# Altium PCB CH340S36P-R1.PcbDoc
Units mil, origin at the board's own origin, x right, y up, seen from the top; angles counter-clockwise.
Board outline 1580 x 815 mil, 2 copper layers (TopLayer, BottomLayer); 10 components, 26 nets, 84 pads, 20 vias.
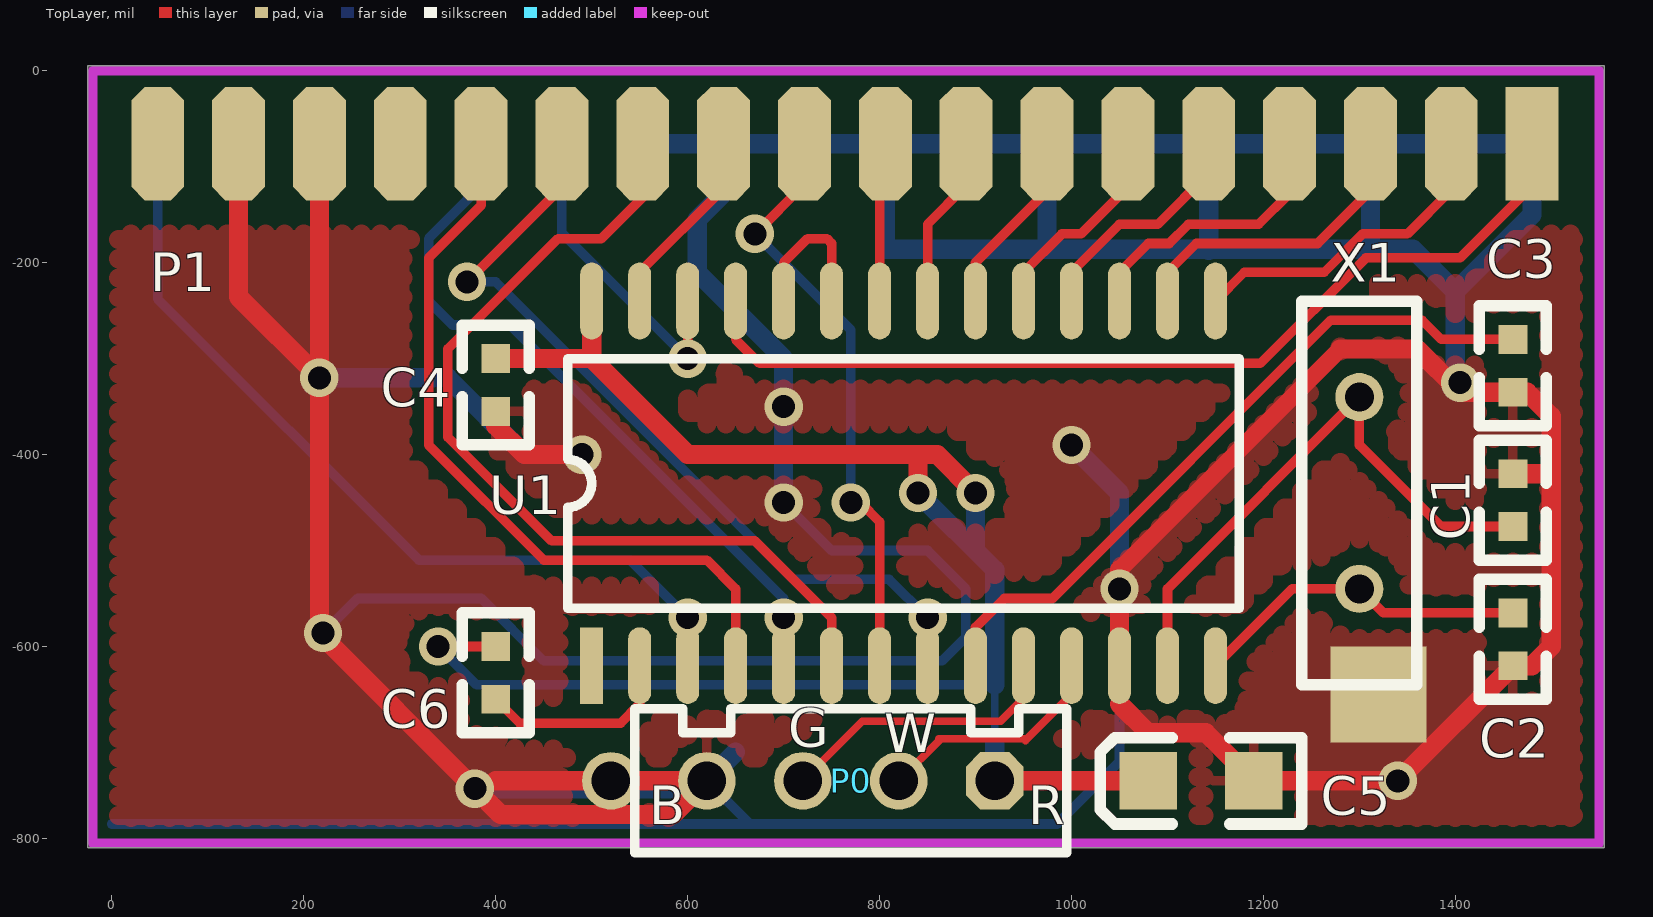
[diagram p0: TopLayer view]
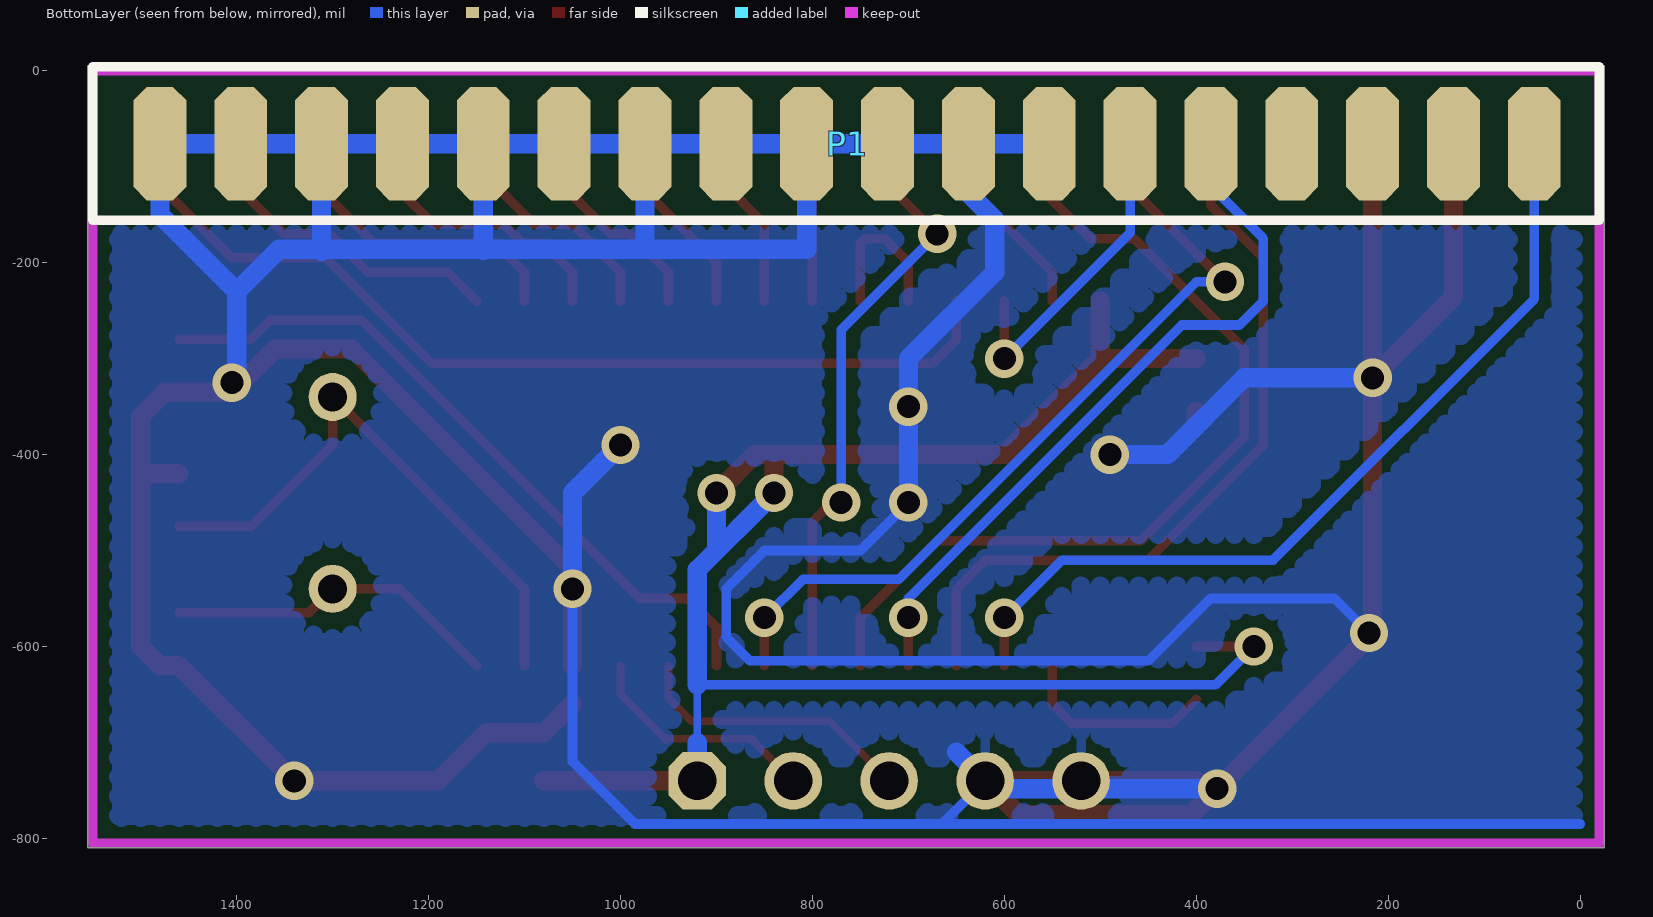
[diagram p1: BottomLayer view, seen from below]

## Layer stack, top to bottom
TopSolder: solder mask 0.4, Solder Resist, Dk 3.5
TopLayer: signal copper 1.4
Dielectric1: dielectric 12.6, FR-4, Dk 4.8
BottomLayer: signal copper 1.4
BottomSolder: solder mask 0.4, Solder Resist, Dk 3.5

## Board outline
-25,-810 1555,-810 1555,5 -25,5

## Design rules (kind name [scope] priority, off if disabled: settings)
Clearance Clearance_1 [(InPoly)] p1: gap=12 ignorepadtopadclearanceinfootprint=FALSE
Clearance [All] p2: gap=10 ignorepadtopadclearanceinfootprint=FALSE
ComponentClearance [All] p1 off: gap=10 collisioncheckmode=3 verticalgap=10 showdistances=FALSE
FabricationTestPointUsage TestPointUsage [All] p1: valid=0 allowmultiple=FALSE
FabricationTestpoint Testpoint [All] p1: side=3 testpointundercomponent=TRUE minsize=40 maxsize=100 preferedsize=60 minholesize=20 maxholesize=40 preferedholesize=32 testpointgrid=1 allowsidetop=TRUE allowsidebottom=TRUE usegrid=TRUE gridtolerance=0.01
PolygonConnect [All] p1: connectstyle=Relief reliefconductorwidth=10 reliefentries=4 polygonreliefangle="90 Angle" airgapwidth=10
RoutingPriority [All] p1: routingpriority=4
RoutingVias [All] p1: holewidth=24 width=40 viastyle="Through Hole" minholewidth=24 minwidth=40 maxholewidth=28 maxwidth=40
SolderMaskExpansion [All] p1: expansion=4 istentingtop=FALSE
Width Width_3 [InNet('VCC')] p1: maxlimit=30 minlimit=8 preferedwidth=20
Width Width_1 [InNet('GND')] p2: maxlimit=30 minlimit=8 preferedwidth=20
Width [All] p3: maxlimit=30 minlimit=8 preferedwidth=10
26 further rules are at their usual default settings.

## Components (designator, comment, footprint, x,y, rotation, side; value= is the part's Value field where it differs from the comment)
C1 "33p" 0603 1460,-420 r270 top
C2 "33p" 0603 1460,-620 r90 top
C3 "0.1uF" 0603 1460,-280 r270 top
C4 "0.1uF" 0603 400,-300 r270 top
C5 "10uF" 3216 1080,-740 r180 top
C6 "0.1uF" 0603 400,-600 r270 top
P0 "USB" SIP04 920,-740 r270 top
P1 "1284B" 1284B-DB36 1480,-76 r180 bottom
U1 "CH340S" SOP28 500,-620 r90 top
X1 "12MHz" XTAL1 1300,-340 r0 top

## Footprints (in the part's own frame and the unit in brackets; to place one, negate y for a bottom-side part, rotate by r counter-clockwise, add the part's x,y. Pads: shape width x height; smd on the part's side, far side on the other; paste and mask are expansions set on the pad)
0603 [mil]
  rect 30x30 smd: 1(0,0) 2(55,0)
  silkscreen extent -35,-35 90,35
1284B-DB36 [mm]
  rect 1.4x3 smd far side: 1(0,0)
  oct 1.4x3 smd far side: 2(2.14,0) 3(4.28,0) 4(6.42,0) 5(8.56,0) 6(10.7,0) 7(12.84,0) 8(14.98,0) 9(17.12,0) 10(19.26,0) 11(21.4,0) 12(23.54,0) 13(25.68,0) 14(27.82,0) 15(29.96,0) 16(32.1,0) 17(34.24,0) 18(36.38,0)
  oct 1.4x3 smd: 19(0,0) 20(2.14,0) 21(4.28,0) 22(6.42,0) 23(8.56,0) 24(10.7,0) 25(12.84,0) 26(14.98,0) 27(17.12,0) 28(19.26,0) 29(21.4,0) 30(23.54,0) 31(25.68,0) 32(27.82,0) 33(29.96,0) 34(32.1,0) 35(34.24,0) 36(36.38,0)
  silkscreen extent -1.78,-2.03 38.1,2.03
3216 [mil]
  rect 60x60 smd: 1(0,0) 2(-110,0)
  silkscreen extent -160,-45 50,45
SIP04 [mil]
  oct 60x60 hole 40: 1(0,0)
  round 60 hole 40: 2(0,-100) 3(0,-200) 4(0,-300)
  silkscreen extent -75,-375 75,75
SOP28 [mil]
  rect 80x24 smd: 1(0,0)
  oval 80x24 smd: 2(0,-50) 3(0,-100) 4(0,-150) 5(0,-200) 6(0,-250) 7(0,-300) 8(0,-350) 9(0,-400) 10(0,-450) 11(0,-500) 12(0,-550) 13(0,-600) 14(0,-650) 15(380,-650) 16(380,-600) 17(380,-550) 18(380,-500) 19(380,-450) 20(380,-400) 21(380,-350) 22(380,-300) 23(380,-250) 24(380,-200) 25(380,-150) 26(380,-100) 27(380,-50) 28(380,0)
  silkscreen extent 60,-675 320,25
XTAL1 [mil]
  round 50 hole 30: 1(0,0) 2(0,-200)
  silkscreen extent -60,-300 60,100

## Part data
C1 C2 C3 C6: library part CAP
C4 C5: library part CAP, "Capacitor"
U1: library part CH340S_P
X1: library part CRYSTAL, "Crystal"

## Free pads (board coordinates)
  round 60 hole 40: 0(520,-740)
  rect 100x100 smd: 1(1320,-650)

## Via types
v1: diameter 40, hole 24, TopLayer to BottomLayer, 20 vias

## Nets (pads, with @x,y where several pads share a name; then routed paths per layer and width w, separated by ;. In a path a pad name is that pad's centre, name@x,y a point inside that pad or via, vN(x,y) a via of type N, cw(c..) or ccw(c..) an arc to the next point about the centre after c; other vN are vias at no path point)
ACK#: P1.10 U1.7 | length 625.1
  TopLayer w10: v1(670,-170) 721.73,-118.27 P1.10 ; v1(770,-450) 780,-450 800,-470 U1.7
  BottomLayer w10: v1(670,-170) 770,-270 v1(770,-450)
AFD#: P1.14 U1.4 | length 798.8
  TopLayer w10: P1.14 384.72,-140.28 330,-195 330,-390 450,-510 620,-510 650,-540 U1.4
BUSY: P1.11 U1.27 | length 200.2
  TopLayer w10: U1.27 550,-210 637.48,-122.52 P1.11
D0: P1.2 U1.15 | length 341.9
  TopLayer w10: U1.15 1180,-210 1263.43,-210 1303.43,-170 1350,-170 1395.75,-124.25 P1.2
D1: P1.3 U1.16 | length 325.7
  TopLayer w10: U1.16 1100,-210 1130,-180 1256.5,-180 1311.5,-125 P1.3
D2: P1.4 U1.17 | length 293.1
  TopLayer w10: U1.17 1050,-210 1080,-180 1101.72,-180 1121.72,-160 1195,-160 1227.24,-127.76 P1.4
D3: P1.5 U1.18 | length 246.7
  TopLayer w10: U1.18 1000,-210 1050,-160 1090,-160 1142.99,-107.01 P1.5
D4: P1.6 U1.19 | length 220.8
  TopLayer w10: U1.19 950,-210 990,-170 1010,-170 1058.74,-121.26 P1.6
D5: P1.7 U1.20 | length 194.9
  TopLayer w10: U1.20 900,-200 974.49,-125.51 P1.7
D6: P1.8 U1.21 | length 180.7
  TopLayer w10: U1.21 850,-160 890.24,-119.76 P1.8
D7: P1.9 U1.22 | length 166.5
  TopLayer w10: U1.22 800,-81.98 P1.9
ERR#: P1.32 U1.5 | length 755.1
  TopLayer w10: U1.5 v1(700,-570)
  BottomLayer w10: P1.32 384.72,-120.28 330,-175 330,-240 355,-265 415,-265 700,-550 v1(700,-570)
GND: C1.1 C2.1 C3.2 C4.2 C5.2 P0.4 P1.16 P1.17 P1.19 P1.20 P1.21 P1.22 P1.23 P1.24 P1.25 P1.26 P1.27 P1.28 P1.29 P1.30 pad.0 pad.1 U1.12 | length 8901.6
  TopLayer w18: 1050,-520 1280,-290
  TopLayer w20: P1.17 131.97,-235.75 v1(216.22,-320) ; P1.16 216.22,-586.22 v1(378.19,-748.19) 405,-775 585,-775 P0.4 400,-740 ; C4.2 400,-370 430,-400 v1(490,-400) ; 1050,-660 1080,-690 1140,-690 C5.2 v1(1340,-740) C2.1 1480,-620 1500,-600 1500,-360 1475,-335 v1@1405,-335 ; U1.12 1050,-520 ; 1280,-290 1360,-290 v1@1405,-335 ; v1(1405,-325) v1@1405,-335 ; C1.1 1500,-420
  BottomLayer w10: 0,-785 985,-785 1050,-720 v1(1050,-540) ; v1(220,-586) 256,-550 385,-550 450,-615 865,-615 890,-590 890,-540 850,-500 750,-500 v1(700,-450) ; P0.4 665,-785
  BottomLayer w20: v1(216.22,-320) 350,-320 430,-400 v1(490,-400) ; v1(378.19,-748.19) 611.81,-748.19 650,-710 ; P1.30 P1.19 1480,-150 1400,-230 ; P1.29 637.48,-127.52 610,-155 610,-210 700,-300 v1(700,-450) ; P1.27 805.98,-185.98 1355.98,-185.98 1400,-230 ; 974.49,-184.49 P1.25 ; v1(1000,-390) 1050,-440 v1(1050,-540) ; 1142.99,-187.01 P1.23 ; 1311.5,-188.5 P1.21 ; v1(1405,-325) 1400,-320 1400,-230
  other v1: 700,-350
INI#: P1.31 U1.26 | length 338.3
  TopLayer w10: v1(600,-300) U1.26
  BottomLayer w10: P1.31 468.98,-168.98 v1(600,-300)
NetC1_2: C1.2 U1.13 X1.1 | length 615.1
  TopLayer w10: U1.13 1100,-540 X1.1@1305,-335 ; X1.1 1300,-390 1385,-475 C1.2
NetC2_2: C2.2 U1.14 X1.2 | length 353.5
  TopLayer w10: U1.14 1230,-540 X1.2 1325,-565 C2.2
NetU1_23: U1.23 U1.24 | length 162.4
  TopLayer w10: U1.24 700,-200 725,-175 745,-175 750,-180 U1.23
PEMP: P1.12 U1.6 | length 944.2
  TopLayer w10: P1.12 553.23,-131.77 510,-175 465,-175 350,-290 350,-381.72 458.28,-490 670,-490 750,-570 U1.6
RSTI: C6.2 U1.2 | length 208.6
  TopLayer w10: C6.2 425,-680 530,-680 550,-660 U1.2
SIN#: P1.36 U1.3 | length 911.6
  TopLayer w10: U1.3 v1(600,-570)
  BottomLayer w10: P1.36 47.72,-237.72 320,-510 540,-510 v1(600,-570) v1@590,-570
SLCT: P1.13 U1.8 | length 860
  TopLayer w10: v1(370,-220) 468.98,-121.02 P1.13 ; U1.8 v1(850,-570)
  BottomLayer w10: v1(370,-220) 400,-220 710,-530 810,-530 v1(850,-570)
STB#: P1.1 U1.25 | length 1001
  TopLayer w10: U1.25 650,-280 675,-305 1196.72,-305 1306.72,-195 1405,-195 1480,-120 P1.1
UD+: P0.3 U1.10 | length 299.6
  TopLayer w8: P0.3 782,-678 926,-678 950,-654 U1.10
UD-: P0.2 U1.11 | length 252.1
  TopLayer w8: P0.2 864,-696 ; 862,-696 954,-696 ; 952,-698 1000,-650 U1.11
V3: C3.1 U1.9 | length 740.8
  TopLayer w10: U1.9 900,-580 930,-550 980,-550 1270,-260 1365.36,-260 1385.36,-280 C3.1
VCC: C4.1 C5.1 C6.1 P0.1 U1.28 | length 1867.7
  TopLayer w10: v1(340,-600) C6.1
  TopLayer w20: C4.1 500,-300 ; U1.28 500,-300 ; v1(840,-440) 840,-400 ; v1(900,-440) 860,-400 600,-400 500,-300 ; P0.1 C5.1
  BottomLayer w8: 920,-700 920,-640
  BottomLayer w10: v1(340,-600) 380,-640 920,-640
  BottomLayer w20: v1(840,-440) 920,-520 920,-640 ; 900,-500 v1(900,-440) ; P0.1 920,-700
pads on no net: P1.15 P1.18 P1.33 P1.34 P1.35 U1.1

## Polygon pours and split planes (outlines as drawn)
GND on BottomLayer "BottomLayer-GND" (hatched 90Degree grid 20 track 20, remove dead copper, pour order 1): 1525,-805 1525,-170 0,-170 0,-805
GND on TopOverlay (hatched 90Degree grid 20 track 8, remove dead copper): 0,-180
GND on TopLayer "TopLayer-GND" (hatched 90Degree grid 20 track 20, remove dead copper, pour order 0): 1525,-805 1525,-170 0,-170 0,-805

## Keep-outs
KeepOutLayer:
  lines w10: -20,-805 1550,-805 1550,0 -20,0 -20,-805

## Silkscreen, mask and mechanical layers (free items; w line width, h text height)
TopOverlay:
  text "G" at 705,-705 h40
  text "W" at 805,-710 h40
  text "B" at 560,-785 h40
  text "R" at 955,-785 h40
Mechanical1:
  lines w10: -20,-805 1550,-805 1550,0 -20,0 -20,-805